# Altium PCB LCD_Board.PcbDoc
Units mil, origin at the board's own origin, x right, y up, seen from the top; angles counter-clockwise.
Board outline 2900 x 1740 mil, 2 copper layers (Top Layer, Bottom Layer), stack 63.2 mil thick; 43 components, 46 nets, 138 pads, 21 vias.
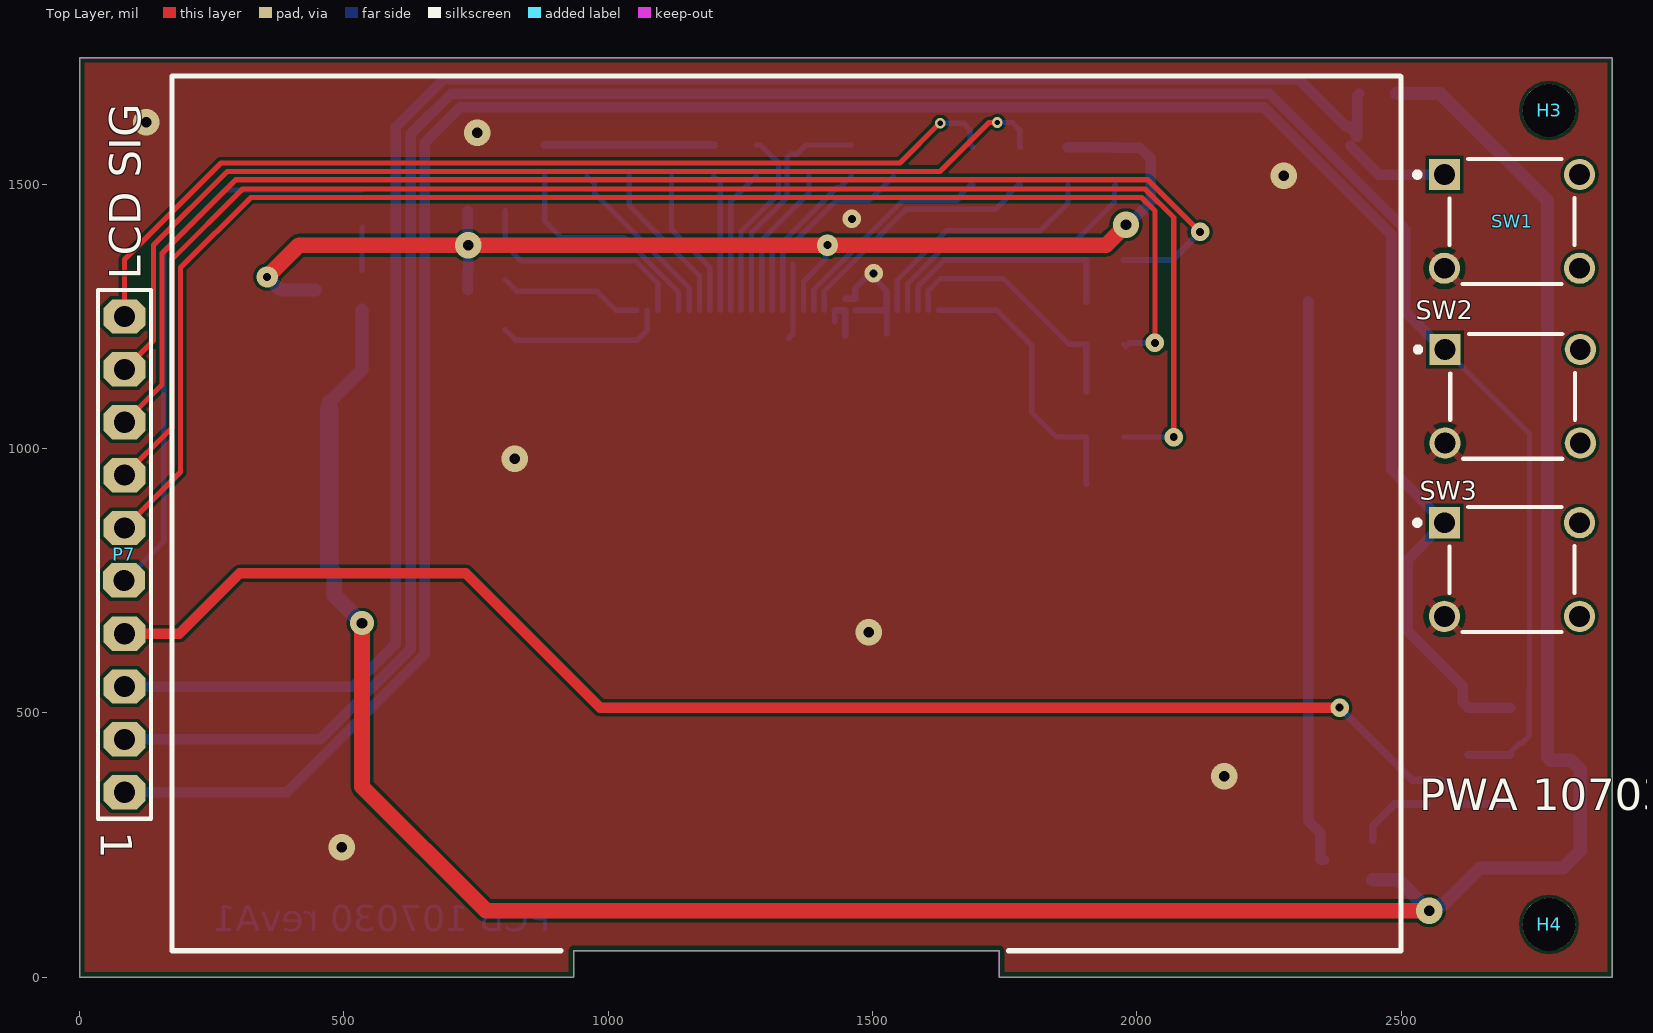
[diagram p0: Top Layer view]
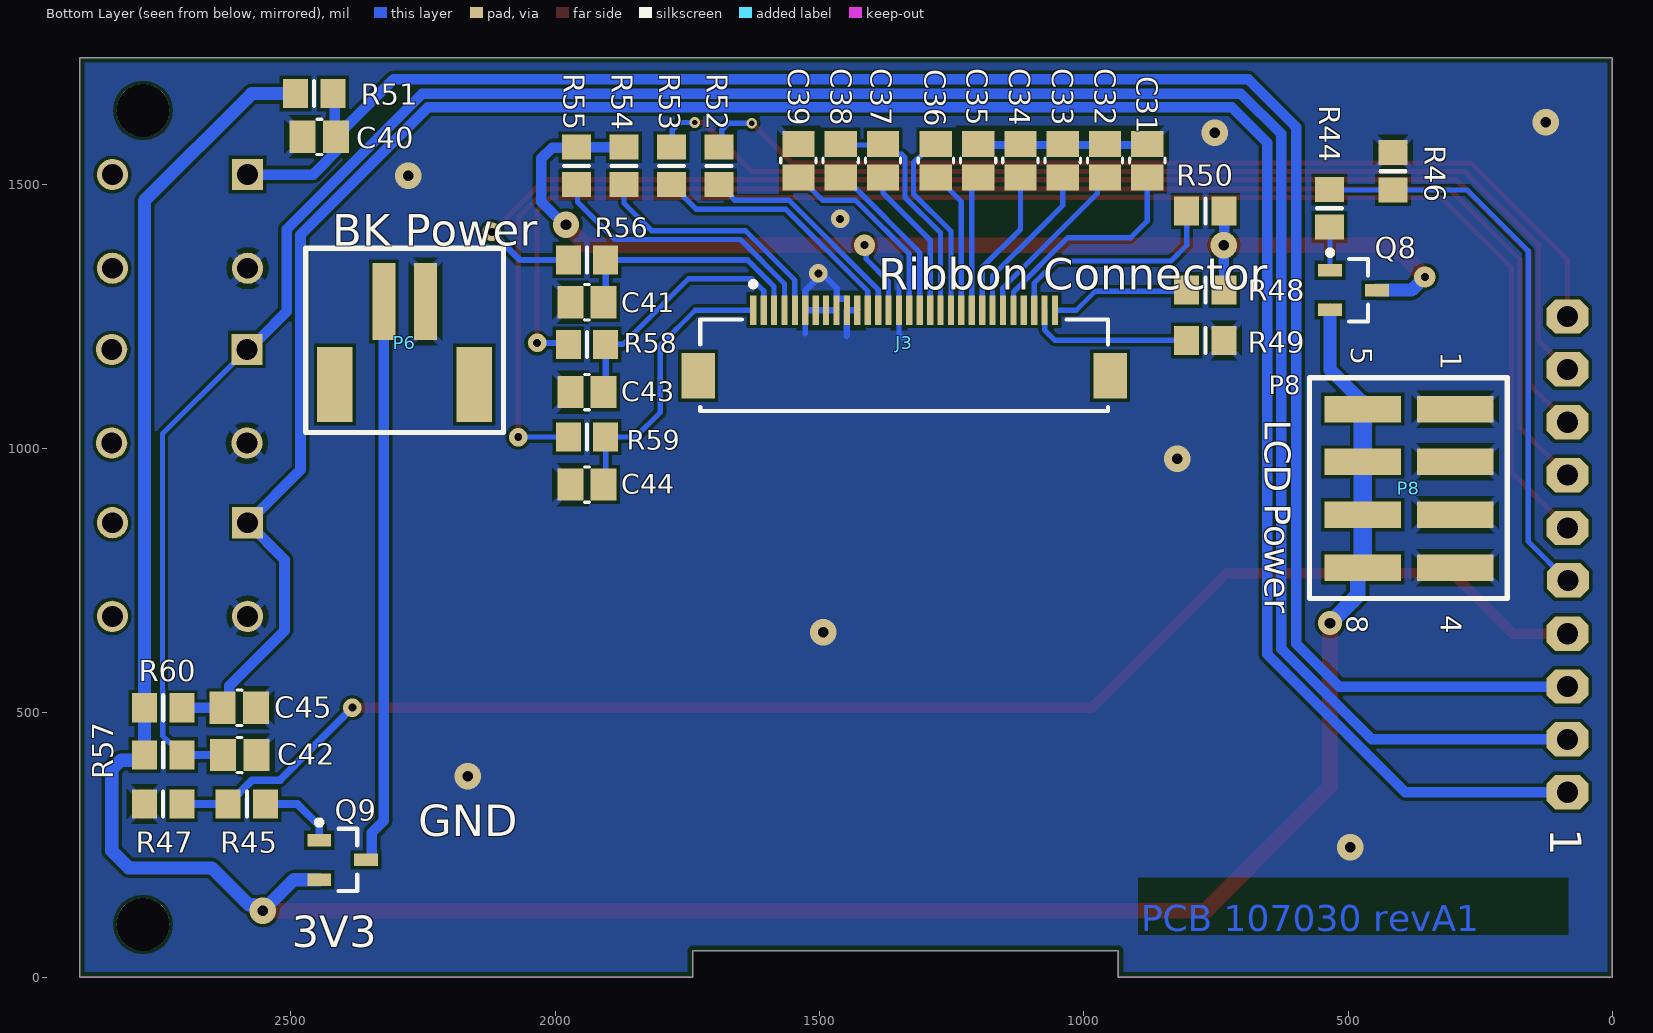
[diagram p1: Bottom Layer view, seen from below]
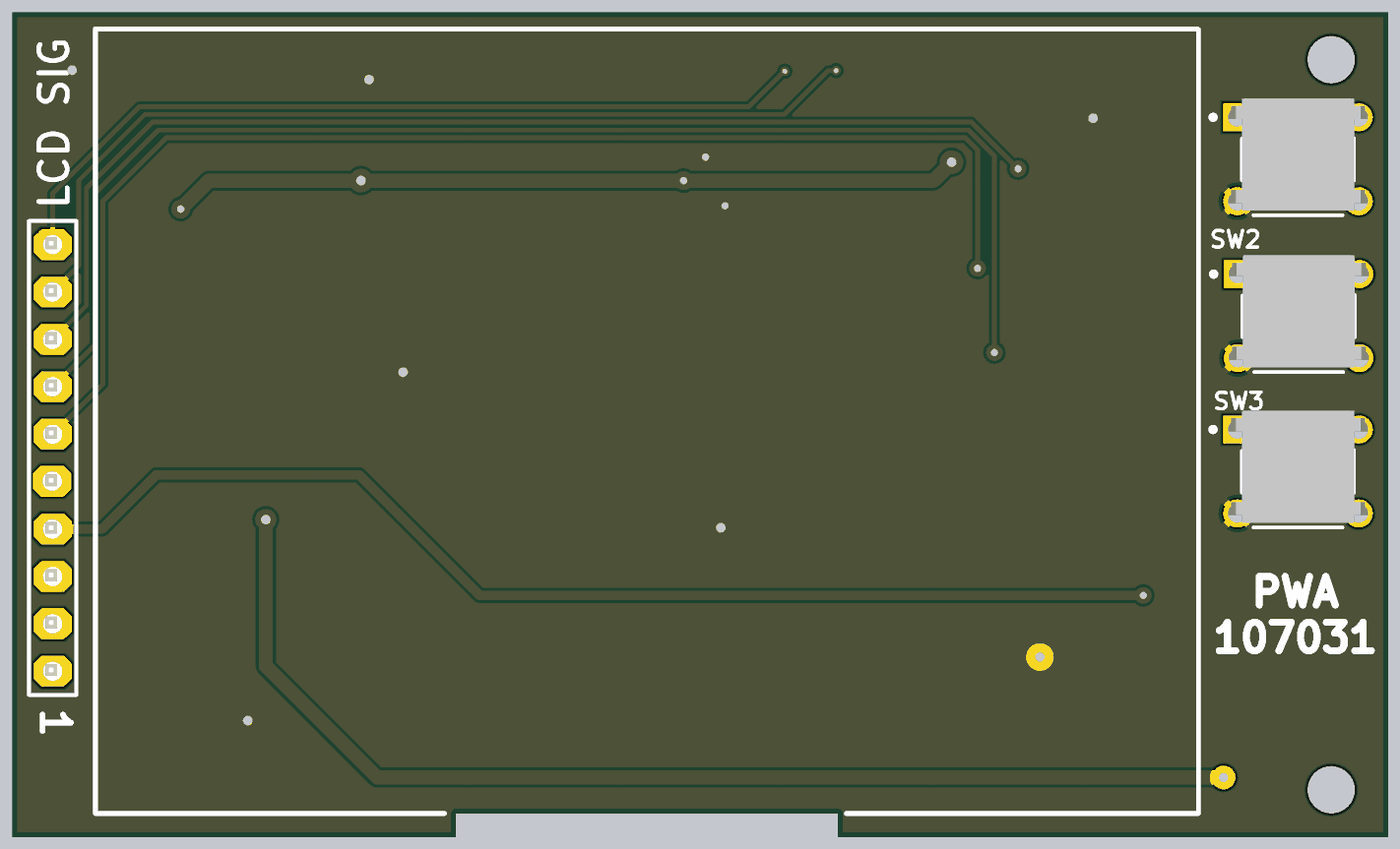
[diagram p2: 3D render of the assembled board from above, using the file's embedded part models]

## Layer stack, top to bottom
Top Solder: solder mask 0.4, Solder Resist, Dk 3.5
Top Layer: signal copper 1.4
Dielectric 1: dielectric 60.4, FR-4, Dk 4.8
Bottom Layer: signal copper 1.4
Bottom Solder: solder mask 0.4, Solder Resist, Dk 3.5

## Board outline
0,0 0,1740 2900,1740 2900,0 1740,0 1740,50 935,50 935,0

## Design rules (kind name [scope] priority, off if disabled: settings)
BoardOutlineClearance [All] p1: gap=10 ignorepadtopadclearanceinfootprint=FALSE
Clearance [All] p1: gap=6 ignorepadtopadclearanceinfootprint=TRUE
ComponentClearance [All] p1 off: gap=10 collisioncheckmode=3 verticalgap=10 showdistances=FALSE
Height [All] p1 off: minheight=0 maxheight=2000 prefheight=500
HoleSize [All] p1: absolutevalues=TRUE maxlimit=200 minlimit=5 maxpercent=80.000 minpercent=20.000
HoleToHoleClearance [All] p1: gap=5 allowstackedmicrovias=TRUE
MinimumAnnularRing [All] p1: minimumring=5
MinimumSolderMaskSliver [All] p1: minsoldermaskwidth=1
PlaneConnect [All] p1: pad.planeconnectstyle=Relief pad.reliefexpansion=20 pad.reliefentries=4 pad.reliefconductorwidth=10 pad.reliefairgap=10 via.planeconnectstyle=Direct via.reliefexpansion=20 via.reliefentries=4 via.reliefconductorwidth=10 via.reliefairgap=10
PolygonConnect [All] p1: thpad.connectstyle=Relief thpad.reliefconductorwidth=15 thpad.reliefentries=4 thpad.polygonreliefangle="45 Angle" thpad.airgapwidth=10 smdpad.connectstyle=Relief smdpad.reliefconductorwidth=12 smdpad.reliefentries=4 smdpad.polygonreliefangle="45 Angle" smdpad.airgapwidth=10 via.connectstyle=Direct via.reliefconductorwidth=20 via.reliefentries=4 via.polygonreliefangle="45 Angle" via.airgapwidth=10
RoutingVias [All] p1: holewidth=10 width=20 viastyle="Through Hole" minholewidth=5 minwidth=10 maxholewidth=20 maxwidth=50
ShortCircuit [InNet('GND') vs InNet('GND')] p1 off: allowed=TRUE
ShortCircuit ShortCircuit_1 [All] p2: allowed=FALSE
SilkToSilkClearance [All] p1 off: silktosilkclearance=1
SilkToSolderMaskClearance [IsPad] p1: minsilkscreentomaskgap=1 clearancetoexposedcopper=TRUE
SolderMaskExpansion [All] p1: expansion=4 istentingtop=FALSE
Width [All] p1: maxlimit=50 minlimit=5 preferedwidth=10 minimp=50.000000 maximp=50.000000 favimp=50.000000
21 further rules are at their usual default settings.

## Classes and differential pairs
component class Daughter_board_LCD: C31 C32 C33 C34 C35 C36 C37 C38 C39 C40 C41 C42 C43 C44 C45 H3 H4 J3 P6 P7 P8 Q8 Q9 R44 R45 R46 R47 R48 R49 R50 R51 R52 R53 R54 R55 R56 R57 R58 R59 R60

## Components (designator, comment, footprint, x,y, rotation, side; value= is the part's Value field where it differs from the comment)
C31 "Cap" C0805 880,1545 r90 bottom value=1uF
C32 "Cap" C0805 960,1545 r90 bottom value=1uF
C33 "Cap" C0805 1040,1545 r90 bottom value=1uF
C34 "Cap" C0805 1120,1545 r90 bottom value=1uF
C35 "Cap" C0805 1200,1545 r90 bottom value=1uF
C36 "Cap" C0805 1280,1545 r90 bottom value=1uF
C37 "Cap" C0805 1380,1545 r90 bottom value=1uF
C38 "Cap" C0805 1460,1545 r90 bottom value=1uF
C39 "Cap" C0805 1540,1545 r90 bottom value=1uF
C40 "Cap" C0805 2446.47,1590 r0 bottom value=0.1uF
C41 "Cap" C0805 1940,1277.13 r0 bottom value=0.1uF
C42 "Cap" C0805 2597.15,420.44 r180 bottom value=0.1uF
C43 "Cap" C0805 1940,1107.13 r0 bottom value=0.1uF
C44 "Cap" C0805 1940,932.13 r0 bottom value=0.1uF
C45 "Cap" C0805 2597.75,509.88 r180 bottom value=0.1uF
H3 "LCD Board Mounting Hole" "Mount Hole LCD Board" 2780,1640 r0 top
H4 "LCD Board Mounting Hole" "Mount Hole LCD Board" 2780,100 r0 top
J3 "Ribbon Connector" 52892-3033 1340,1200 r0 bottom locked
P6 "BK Power" A2001WR-S-2P 2285,1200 r0 bottom
P7 "LCD SIG" "10 PIN HEADER" 85,800 r0 top
P8 "LCD Power" "MOLEX 15-91-6082" 385,925 r270 bottom
Q8 "MOSFET-P" SOT-23_N 490,1300 r180 bottom
Q9 "MOSFET-P" SOT-23_N 2402.29,222 r180 bottom
R44 "Res3" 6-0805_N 535,1455 r90 bottom value=100
R45 "Res3" 6-0805_N 2583.37,328 r0 bottom value=100
R46 "Res3" 6-0805_N 415,1525 r90 bottom value=100K
R47 "Res3" 6-0805_N 2742,328 r0 bottom value=100K
R48 "Res3" 6-0805_N 770,1300 r0 bottom value=10K
R49 "Res3" 6-0805_N 770,1205 r0 bottom value=10K
R50 "Res3" 6-0805_N 770,1450 r0 bottom value=10K
R51 "Res3" 6-0805_N 2456.2,1671.9 r0 bottom value=10K
R52 "Res3" 6-0805_N 1690,1535 r90 bottom value=100K
R53 "Res3" 6-0805_N 1780,1535 r90 bottom value=100K
R54 "Res3" 6-0805_N 1870,1535 r90 bottom value=10K
R55 "Res3" 6-0805_N 1960,1535 r90 bottom value=10K
R56 "Res3" 6-0805_N 1940,1357.13 r0 bottom value=10K
R57 "Res3" 6-0805_N 2741.75,420.44 r0 bottom value=10K
R58 "Res3" 6-0805_N 1940,1197.13 r0 bottom value=10K
R59 "Res3" 6-0805_N 1940,1022.13 r0 bottom value=10K
R60 "Res3" 6-0805_N 2741.75,509.88 r0 bottom value=10K
SW1 "" "Omron B3F-1000" 2582.25,1518.58 r0 top locked
SW2 "" "Omron B3F-1000" 2583.57,1187.76 r0 top locked
SW3 "" "Omron B3F-1000" 2582.25,860 r0 top locked

## Footprints (in the part's own frame and the unit in brackets; to place one, negate y for a bottom-side part, rotate by r counter-clockwise, add the part's x,y. Pads: shape width x height; smd on the part's side, far side on the other; paste and mask are expansions set on the pad)
6-0805_N [mm] "Chip Resistor, Body 2.0x1.2mm, IPC Medium Density"
  rect 1.2x1.4 smd: 1(-0.9,0) 2(0.9,0)
  silkscreen extent 0,-0.6 0,0.6, body extent -1.07,-0.7 1.07,0.7, height 0.7
"10 PIN HEADER" [mil] "10 pin header, vertical"
  oct 80x65 hole 40: 1(0,-450) 2(0,-350) 3(0,-250) 4(0,-150) 5(-1,-49) 6(0,50) 7(0,150) 8(0,250) 9(0,350) 10(0,450)
  silkscreen extent -50,-500 50,500, body extent -53,-497 47,503, height 340
52892-3033 [mm] "0.5 mm Pitch Easy-On(TM) Type FPC Connector, 2.0 mm Mated Height, Right Angle, ZIF, SMT, Bottom Contact, 30 Circuits, -40 to 85 degC, ELV and RoHS Compliant, Tape and Reel"
  rect 0.3x1.4 smd: 1(7.25,-1.575) 2(6.75,-1.575) 3(6.25,-1.575) 4(5.75,-1.575) 5(5.25,-1.575) 6(4.75,-1.575) 7(4.25,-1.575) 8(3.75,-1.575) 9(3.25,-1.575) 10(2.75,-1.575) 11(2.25,-1.575) 12(1.75,-1.575) 13(1.25,-1.575) 14(0.75,-1.575) 15(0.25,-1.575) 16(-0.25,-1.575) 17(-0.75,-1.575) 18(-1.25,-1.575) 19(-1.75,-1.575) 20(-2.25,-1.575) 21(-2.75,-1.575) 22(-3.25,-1.575) 23(-3.75,-1.575) 24(-4.25,-1.575) 25(-4.75,-1.575) 26(-5.25,-1.575) 27(-5.75,-1.575) 28(-6.25,-1.575) 29(-6.75,-1.575) 30(-7.25,-1.575)
  rect 1.6x2.2 smd: MP1(9.9,1.575) MP2(-9.9,1.575)
  silkscreen extent -9.8,-2.95 9.8,3.28, body extent -10.2,-1.73 10.2,3.77, height 2.05
A2001WR-S-2P [mm] "Surface Mount Right Angle Backlight Connector for COG LCD modules"
  rect 1.7x3.6 smd: 0(-3.35,2) 0(3.35,2)
  rect 1.1x3.7 smd: 1(-1,-2) 2(1,-2)
  silkscreen extent -4.75,-4.55 4.75,4.3, body extent -4.75,-4.55 4.75,4.3, height 5.5
C0805 [mm]
  rect 1.25x1.55 smd: 1(-0.8,0) 2(0.8,0)
  silkscreen extent -0.12,-0.85 0.12,0.85, body extent -0.9,-0.66 1.1,0.59, height 0.6
"MOLEX 15-91-6082" [mm] "Surface Mount 2 x 4 Header Pins"
  rect 1.27x3.68 smd: 1(-3.81,2.22) 2(-1.27,2.22) 3(1.27,2.22) 4(3.81,2.22) 5(-3.81,-2.22) 6(-1.27,-2.22) 7(1.27,-2.22) 8(3.81,-2.22)
  silkscreen extent -5.31,-4.78 5.29,4.72, body extent -5.08,-3.62 5.08,3.37, height 9.68
"Mount Hole LCD Board" [mil]
  round 100 hole 100 unplated: 0(0,0)
"Omron B3F-1000" [mm]
  rect 1.5x1.5 hole 1 paste+0: 1(-0.005,0)
  round 1.5 hole 1 paste+0: 2(6.495,0) 3(-0.005,-4.5) 4(6.495,-4.5)
  silkscreen extent -1.43,-5.25 6.24,0.75, body extent -0.59,-4.99 7.11,1.01, height 4.43
SOT-23_N [mm] "SOT23, 3-Leads, Body 2.9x1.3mm, Pitch 0.95mm, Lead Span 2.5mm, IPC Medium Density"
  rect 1.15x0.6 smd: 1(-1.125,0.95) 2(-1.125,-0.95) 3(1.125,0)
  silkscreen extent -1.25,-1.5 0.7,1.92, body extent -0.7,-1.5 0.7,1.5, height 1.1

## Part data
C31 C32 C33 C34 C35 C36 C37 C38 C39 C40 C41 C42 C43 C44 C45: "Capacitor", PackageReference=0805
J3: library part MOLX-52892-3033, "0.5 mm Pitch Easy-On(TM) Type FPC Connector, 2.0 mm Mated Height, Right Angle, ZIF, SMT, Bottom Contact, 30 Circuits, -40 to 85 degC, ELV and RoHS Compliant, Tape and Reel", ComponentLink1Description="Manufacturer URL", ComponentLink1URL=http://www.molex.com/molex/index.jsp, PackageReference=52892-3033
P6: library part "Header 2", "Header, 2-Pin"
P7: library part "Header 10", "Header, 10-Pin"
P8: library part "Header 4X2A", "Header, 4-Pin, Dual row"
Q8 Q9: "P-Channel MOSFET", MFR P/N=NDS0605, ComponentLink1Description=Datasheet
R44 R45 R46 R47 R48 R49 R50 R51 R52 R53 R54 R55 R56 R57 R58 R59 R60: "Resistor", PACKAGE="0805 SMD 1/8W", ComponentLink1Description=Datasheet

## Via types
v1: diameter 50, hole 20, Top Layer to Bottom Layer, tented both sides, 8 vias
v2: diameter 35, hole 15, Top Layer to Bottom Layer, tented both sides, 6 vias
v3: diameter 20, hole 10, Top Layer to Bottom Layer, tented both sides, 2 vias
v4: diameter 50, hole 20, Top Layer to Bottom Layer, 2 vias
v5: diameter 40, hole 15, Top Layer to Bottom Layer, tented both sides, 2 vias
v6: diameter 45, hole 20, Top Layer to Bottom Layer, tented both sides, 1 vias

## Nets (pads, with @x,y where several pads share a name; then routed paths per layer and width w, separated by ;. In a path a pad name is that pad's centre, name@x,y a point inside that pad or via, vN(x,y) a via of type N, cw(c..) or ccw(c..) an arc to the next point about the centre after c; other vN are vias at no path point)
3V3: P8.5 P8.6 P8.7 P8.8 Q8.2 Q9.2 R51.2 R57.2 R60.2 | length 5181
  Top Layer w30: v6(534.29,670) 534.29,360.71 769.15,125.85 v4(2553.12,125.85)
  Bottom Layer w25: P8.5@472.4,1087.6 534.29,1149.49 Q8.2 ; Q9.2 2494.37,184.6 v4(2553.12,125.85) 2559.88,125.85 2571.37,137.34 2580.02,137.34 2649.68,207 2807,207 2839.28,239.28 2839.28,393.26 2821.75,410.79 2782.89,410.79 2777.19,416.5 R60.2 2777.19,1468.82 2574.1,1671.9 R51.2
  Bottom Layer w30: P8.8 481.72,765.68 481.72,722.57 v6(534.29,670) ; P8.5 P8.5@472.4,1087.6
  Bottom Layer w35: P8.8 P8.7 P8.6 P8.5
3V3BK: P6.2 Q9.3 | length 1071.5
  Bottom Layer w20: P6.2 2324.37,295.89 2347.17,273.09 2347.17,223.81 2348.98,222 Q9.3@2353.55,222
3V3L: J3.14 Q8.3 R48.1 R50.1 R54.2 R55.2 | length 2372.5
  Top Layer w30: v5(355,1325) 415,1385 v1(735,1385) v5(1415,1385) 1941.81,1385 1980.62,1423.81 v1(1979.68,1423.81)
  Bottom Layer w10: J3.14 1369.53,1316.69 1411.67,1358.83 1411.67,1381.67 v5(1415,1385)
  Bottom Layer w20: R48.1 734.57,1340.43 735,1340.87 v1(735,1385) 734.57,1385.43 R50.1 ; R54.2 R55.2 1960.79,1569.65 2005.84,1569.65 2026.4,1549.09 2026.4,1467.39 1982.83,1423.81 v1(1979.68,1423.81)
  Bottom Layer w25: v5(355,1325) 380,1300 Q8.3
/CS1: P7.7 R59.2 | length 2927.9
  Top Layer w10: P7.7 174.35,1039.35 174.35,1357.55 308.23,1491.43 2015.94,1491.43 2070,1437.37 v2(2070,1022.13)
  Bottom Layer w10: R59.2 v2(2070,1022.13)
/RES: P7.6 R58.2 | length 2759.5
  Top Layer w10: P7.6 191.05,956.05 191.05,1342.51 323.97,1475.43 2009.31,1475.43 2034.57,1450.18 v2(2034.57,1200)
  Bottom Layer w10: R58.2 1979.68,1192.87 R58.2@1986.81,1200
  Bottom Layer w12: R58.2@1986.81,1200 v2(2034.57,1200)
A0: P7.8 R56.2 | length 2577.8
  Top Layer w10: P7.8 156.05,1121.05 156.05,1369.54 295.11,1508.6 2021.4,1508.6 v2(2120,1410)
  Bottom Layer w12: R56.2 2067.13,1357.13 v2(2120,1410)
B_1: C40.1 P7.3 R51.1 SW1.1 | length 3711.2
  Bottom Layer w20: P7.3 517.15,550 598.15,631 598.15,1608.33 688.81,1698.99 2305.99,1698.99 2394.46,1610.51 2400.37,1610.51 2414.98,1595.91 C40.1 ; C40.1@2403.91,1573.03 2458.35,1518.58 SW1.1 ; C40.1@2416.95,1590 2416.95,1668.07 R51.1
B_2: C42.1 P7.2 R57.1 SW2.1 | length 4797.7
  Bottom Layer w10: SW2.1@2582.81,1188.53 2582.81,1188.33 SW2.1 2607.9,1163.24 2608.1,1163.24 2743,1028.34 2743,542.43 2742.56,541.99 2742.56,456.68 2728.88,442.99 2724.94,442.99 2706.32,424.37 R57.1
  Bottom Layer w15: C42.1@2626.68,420.44 R57.1
  Bottom Layer w20: P7.2 455,450 626.75,621.75 626.75,1595.8 702.85,1671.9 2251.52,1671.9 2508,1415.41 2508,1259.55 2560.26,1207.29 2564.05,1207.29 SW2.1@2582.81,1188.53
B_3: C45.1 P7.1 R60.1 SW3.1 | length 4692.4
  Bottom Layer w20: P7.1 391.77,350 652.75,610.98 652.75,623.75 652.85,623.85 652.85,1578.83 719.92,1645.9 2240.75,1645.9 2482,1404.64 2482,960.05 SW3.1 2512.23,790.18 2512.23,655.77 2616.88,551.12 2616.88,520.27 2627.28,509.88 R60.1
BK_Voltage_Control: P7.4 R45.2 R47.1 | length 2852
  Top Layer w20: P7.4 188.85,650 303.25,764.4 730.65,764.4 985.05,510 v2(2384,510)
  Bottom Layer w15: v2(2384,510) 2521.2,372.8 2574,372.8 2598.75,348.06 2602.68,348.06 2618.81,331.94 R45.2 R47.1
GND: C31.2 C32.2 C33.2 C34.2 C35.2 C39.2 C40.2 C41.2 C42.2 C43.2 C44.2 C45.2 J3.6 J3.7 J3.8 J3.9 J3.10 J3.11 J3.15 P6.1 P8.1 P8.2 P8.3 P8.4 R46.2 R47.2 R49.1 SW1.3 SW2.3 SW3.3 | length 824.3
  Bottom Layer w10: 1341.44,1208.94 1349.84,1217.34 J3.15 1349.84,1350.33 ; J3.11@1428.58,1239.57 J3.11 ; 1527.01,1217.59 J3.6
  Bottom Layer w12: J3.11 J3.10 1448.27,1213.97 ; J3.10@1448.36,1283.57 1467.81,1283.57 1467.81,1303.71 1495.92,1331.82 v2(1502.27,1331.82) 1502.27,1323.39 1527.01,1298.65 J3.6 J3.7 J3.8 J3.9
  Bottom Layer w15: C31.2@880,1574.53 960,1574.53 1040,1574.53 1120,1574.53 C35.2@1200,1574.53
  other v1: 496.36,246 1493.44,652.65 823.53,980.92 2278,1516.53 752,1598 126,1618
  other v2: 1461.12,1434.71
  other v4: 2166,380
LCD_Voltage_Control: P7.5 R44.2 R46.1 | length 1078.9
  Bottom Layer w10: P7.5@85,750 159.35,824.35 159.35,1374.35 274.57,1489.57 R46.1 534.13,1489.57 R44.2
NetC31_1: C31.1 J3.26 | length 428.3
  Bottom Layer w10: C31.1@880,1515.47 880,1430.5 911.47,1399.03 1030.86,1399.03 1133.26,1296.64 1133.26,1262.06 J3.26
NetC32_1: C32.1 J3.25 | length 333.7
  Bottom Layer w10: C32.1@960,1515.47 974.01,1501.46 974.01,1483.33 1153.35,1303.99 1153.35,1262.36 J3.25
NetC33_1: C33.1 J3.24 | length 308.4
  Bottom Layer w10: C33.1@1040,1515.47 1040,1460 1085,1415 1172.68,1327.32 J3.24
NetC34_1: C34.1 J3.23 | length 283.4
  Bottom Layer w10: C34.1@1120,1515.47 1120,1415 1192.36,1342.64 J3.23
NetC35_1: C35.1 J3.22 | length 258.5
  Bottom Layer w10: C35.1@1200,1515.47 1212.05,1503.43 J3.22
NetC36_1: C36.1 J3.21 | length 273.5
  Bottom Layer w10: J3.21 1231.73,1467.2 C36.1@1280,1515.47
NetC36_2: C36.2 J3.20 | length 365
  Bottom Layer w10: J3.20 1251.42,1411.42 1322.21,1482.21 1322.21,1541.97 1315.07,1549.11 1313.29,1549.11 1287.87,1574.53 C36.2@1280,1574.53
NetC37_1: C37.1 J3.18 | length 290.4
  Bottom Layer w10: J3.18 1290.79,1394.7 1380,1483.91 C37.1@1380,1515.47
NetC37_2: C37.2 C38.2 J3.19 | length 448.3
  Bottom Layer w10: J3.19 1271.1,1408.47 1338.21,1475.58 1338.21,1551.03 1344.06,1556.89 1356.46,1556.89 1374.09,1574.53 C38.2@1460,1574.53
NetC38_1: C38.1 J3.17 | length 318.5
  Bottom Layer w10: J3.17 1310.47,1371.26 1433.11,1493.9 1438.43,1493.9 C38.1@1460,1515.47
NetC39_1: C39.1 J3.16 | length 377.1
  Bottom Layer w10: J3.16 1330.16,1368.31 1431.84,1470 1494.53,1470 C39.1@1540,1515.47
NetC41_1: C41.1 J3.3 R56.1 | length 464.5
  Bottom Layer w10: J3.3 1586.06,1306.74 1636.44,1357.13 ; C41.1@1904.57,1278.03 C41.1@1905.47,1277.13
  Bottom Layer w12: 1636.44,1357.13 R56.1 C41.1@1904.57,1278.03
NetC43_1: C43.1 J3.2 R58.1 | length 487
  Bottom Layer w10: J3.2 1605.75,1298.93 1628.31,1321.49 1748.03,1321.49 1871.8,1197.72 1903.98,1197.72 R58.1 ; C43.1@1904.57,1108.03 C43.1@1905.47,1107.13
  Bottom Layer w12: C43.1@1904.57,1108.03 R58.1
NetC44_1: C44.1 J3.1 R59.1 | length 543.3
  Bottom Layer w10: J3.1 1735.19,1262.01 1801.3,1195.9 1801.3,1068.87 1848.05,1022.13 R59.1 1904.57,933.03 C44.1@1905.47,932.13
NetJ3_4: J3.4 R55.1 | length 539.4
  Bottom Layer w10: J3.4 1566.38,1312.14 1649.94,1395.7 1886.85,1395.7 1957.95,1466.8 1957.95,1497.51 R55.1
NetJ3_5: J3.5 R54.1 | length 475.4
  Bottom Layer w10: J3.5 1546.69,1318.64 1640.65,1412.6 1818.14,1412.6 1870,1464.46 R54.1
NetJ3_12: J3.12 R53.1 | length 492.9
  Bottom Layer w10: J3.12 1408.9,1298.07 1564.12,1453.29 1733.72,1453.29 1757.44,1477.01 1757.44,1480.94 1776.06,1499.57 R53.1
NetJ3_13: J3.13 R52.1 | length 424.3
  Bottom Layer w10: J3.13 1389.21,1301.01 1558.41,1470.21 1660.65,1470.21 1667.44,1477.01 1667.44,1480.94 1686.06,1499.57 R52.1
NetJ3_27: 
NetJ3_28: J3.28 R50.2 | length 434.6
  Bottom Layer w10: R50.2 805.43,1384.85 835.29,1355 1052.27,1355 1093.94,1313.33 J3.28
NetJ3_29: J3.29 R49.2 | length 322.6
  Bottom Layer w10: R49.2@805.43,1225 825.43,1205 1054.57,1205 1074.25,1224.68 J3.29
NetJ3_30: J3.30 R48.2 | length 273.2
  Bottom Layer w10: R48.2@805.43,1320 827.47,1297.96 978.35,1297.96 1014.3,1262.01 J3.30
NetJ3_MP1: J3.MP1
NetJ3_MP2: J3.MP2
NetQ8_1: Q8.1 R44.1 | length 82.5
  Bottom Layer w10: Q8.1 534.29,1418.86 R44.1
NetQ9_1: Q9.1 R45.1 | length 145.7
  Bottom Layer w15: Q9.1 2446.58,286.56 2488.03,328 R45.1
NetSW1_2: 
NetSW1_4: 
NetSW2_2: 
NetSW2_4: 
NetSW3_2: 
NetSW3_4: 
SCL: P7.9 R53.2 | length 2031.7
  Top Layer w10: P7.9 139.85,1204.85 139.85,1385.06 279.39,1524.6 1627.9,1524.6 1720.44,1617.14 v3(1736.3,1617.14)
  Bottom Layer w10: v3(1736.3,1617.14) 1764.56,1617.14 1778.5,1603.2 1778.5,1571.93 R53.2
SI: P7.10 R52.2 | length 1856.6
  Top Layer w10: P7.10 85,1358.09 267.51,1540.6 1551.87,1540.6 1628.31,1617.03 v3(1628.31,1615.69)
  Bottom Layer w10: v3(1628.31,1615.69) 1672.37,1615.69 1684.87,1603.2 1684.87,1575.56 R52.2
pads on no net: H3.0 H4.0 J3.27 P6.0 SW1.2 SW1.4 SW2.2 SW2.4 SW3.2 SW3.4

## Polygon pours and split planes (outlines as drawn)
GND on Bottom Layer "GND_L02_P003" (solid, remove dead copper, pour order 3): 1536.5,1302.54 1536.5,1227.08 1524.61,1215.2 1421.93,1215.2 1412.68,1224.45 1412.68,1301.85 1473.64,1362.82 1531.39,1362.82 1540,1354.21
GND on Bottom Layer "Bottom Layer-GND" (solid, remove dead copper, pour order 2): 0,0 2900,0 2900,1740 0,1740
GND on Top Layer "Top Layer-GND" (solid, remove dead copper, pour order 0): 0,0 2900,0 2900,1740 0,1740

## Keep-outs
Keep-Out Layer:
  the board outline again, w1

## Other copper
Bottom Layer:
  region: 1105,1115
  region: 1760,1277.13
  text "PCB 107030 revA1" at 891.5,86.75 h50

## Silkscreen, mask and mechanical layers (free items; w line width, h text height)
Top Overlay:
  lines w10: 175,1703.6 175,50 756.25,50 911,50 ; 175,1705 2498,1705 ; 1758,50 1918.75,50 2500,50 2500,1703.6
  text "PWA 107031" at 2534.24,316.33 h60
  text "1" at 40.01,276 h60 r270
Bottom Overlay:
  text "1" at 117.99,282 h60 r90
  text "GND" at 2259.45,266.66 h60
  text "3V3" at 2498.31,56.78 h60
Drill Drawing:
  lines w10: 0,0 935,0 935,50 1740,50 1740,0 2900,0 2900,1740 0,1740 0,0
  lines w12: 4021.79,1327 4132.9,1327 4132.9,1438.11 4021.79,1438.11 4021.79,1327 ; 4021.79,1604.78 4049.57,1604.78 4077.35,1577 4105.13,1604.78 4132.9,1604.78 4105.13,1632.56 4132.9,1660.33 4105.13,1660.33 4077.35,1688.11 4049.57,1660.33 4021.79,1660.33 4049.57,1632.56 4021.79,1604.78 ; 4021.79,1827 4021.79,1854.78 4049.57,1882.56 4021.79,1910.33 4021.79,1938.11 4049.57,1938.11 4077.35,1910.33 4105.13,1938.11 4132.9,1938.11 4132.9,1910.33 4105.13,1882.56 4132.9,1854.78 4132.9,1827 4105.13,1827 4077.35,1854.78 4049.57,1827 4021.79,1827 ; 4021.79,2188.11 4132.9,2188.11 4077.35,2077 4021.79,2188.11 ; 4021.79,2354.78 4049.57,2354.78 4049.57,2327 4105.13,2327 4105.13,2354.78 4132.9,2354.78 4132.9,2410.33 4105.13,2410.33 4105.13,2438.11 4049.57,2438.11 4049.57,2410.33 4021.79,2410.33 4021.79,2354.78 ; 4021.79,2577 4077.35,2604.78 4132.9,2577 4105.13,2632.56 4132.9,2688.11 4077.35,2660.33 4021.79,2688.11 4049.57,2632.56 4021.79,2577
  lines w15: 3923.6,1252 9495.34,1252 ; 3923.6,2752 9495.34,2752 ; 4826.79,1002 4826.79,3002 ; 5717.23,1002 5717.23,3002 ; 7624,1002 7624,3002 ; 8452.19,1002 8452.19,3002 ; 3923.6,1002 9495.34,1002 9495.34,3002 3923.6,3002 3923.6,1002
  text "Symbol" at 4073.6,2827 h120
  text "Count" at 4901.79,2827 h120
  text "Hole Size" at 5792.23,2827 h120
  text "Plated" at 7699,2827 h120
  text "Via/Pad" at 8527.19,2827 h120
  text "2" at 4901.79,2577 h100
  text "10.00mil (0.254mm)" at 5792.23,2577 h100
  text "PTH" at 7699,2577 h100
  text "Via" at 8527.19,2577 h100
  text "2" at 4901.79,2327 h100
  text "100.00mil (2.540mm)" at 5792.23,2327 h100
  text "NPTH" at 7699,2327 h100
  text "Pad" at 8527.19,2327 h100
  text "8" at 4901.79,2077 h100
  text "15.00mil (0.381mm)" at 5792.23,2077 h100
  text "PTH" at 7699,2077 h100
  text "Via" at 8527.19,2077 h100
  text "10" at 4901.79,1827 h100
  text "40.00mil (1.016mm)" at 5792.23,1827 h100
  text "PTH" at 7699,1827 h100
  text "Pad" at 8527.19,1827 h100
  text "11" at 4901.79,1577 h100
  text "20.00mil (0.508mm)" at 5792.23,1577 h100
  text "PTH" at 7699,1577 h100
  text "Via" at 8527.19,1577 h100
  text "12" at 4901.79,1327 h100
  text "39.37mil (1.000mm)" at 5792.23,1327 h100
  text "PTH" at 7699,1327 h100
  text "Pad" at 8527.19,1327 h100
  text "45 Total" at 4901.79,1077 h100
  text "DANIEL HAHAJ / DETEX CORP / 302 DETEX DR / NEW BRAUNFELS, TX 78130 / 830-629-2900 / P/N 107030" at 3890,-248.89 h100
  text "BOARD SPECS: /  FR-4 MATERIAL, 2 SIDED /  1OZ COPPER POUR, 1.6MM THICKNESS /  LEAD-FREE HASL FINISH  /  WHITE SILKSCREEN/GREEN MASK, BOTH SIDES" at 3906,-1385.22 h100

## Dimensions
0,0 to 1740,0 on Drill Drawing
0,0 to 935,0 on Drill Drawing
0,1740 to 0,0 on Drill Drawing
0,0 to 2900,0 on Drill Drawing

## Text inside footprints (layer, text, board x,y; h text height)
P8: Bottom Overlay "8" at 502.32,685.24 h40 r90; Bottom Overlay "4" at 325.16,685.24 h40 r90; Bottom Overlay "5" at 494.45,1193.11 h40 r90; Bottom Overlay "1" at 325.16,1183.11 h40 r90